# Altium PCB REB215_XPRO_A.PcbDoc (part 2 of 2)
Units mm, origin at the board's own origin, x right, y up, seen from the top; angles counter-clockwise.
Board outline 71.5 x 30 mm, 4 copper layers (Top Layer LF-signals, Mid-1, Mid-2, Bottom Layer LF-signals), stack 0.778 mm thick; 79 components, 55 nets, 329 pads, 316 vias.
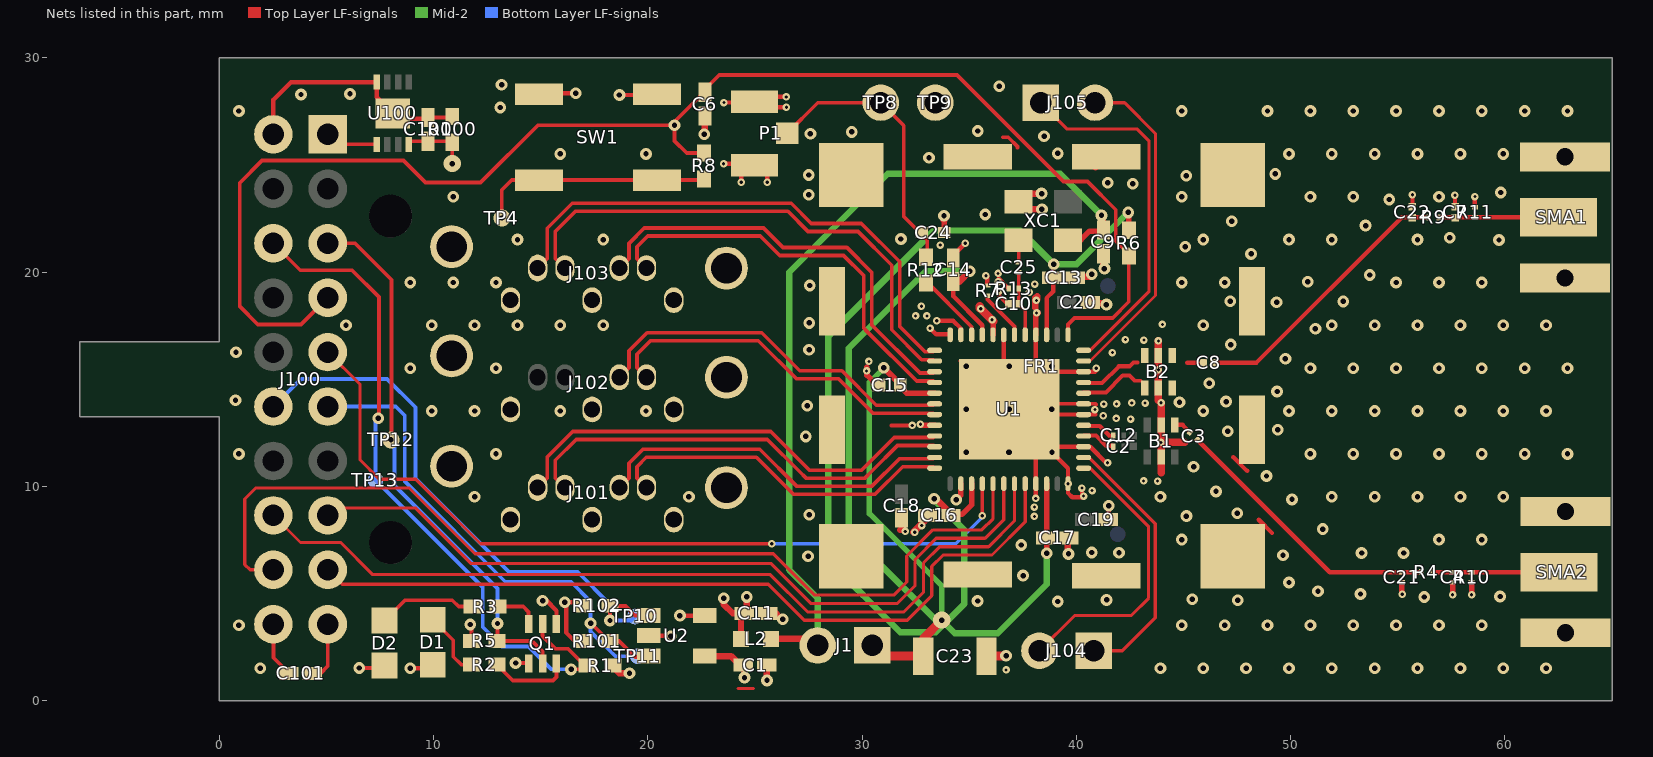
[diagram p4: the nets of this part, all layers, seen from the top]

## Via types
v1: diameter 0.55, hole 0.25, Top Layer LF-signals to Bottom Layer LF-signals, 165 vias
v2: diameter 0.35, hole 0.15, Top Layer LF-signals to Bottom Layer LF-signals, 66 vias
v3: diameter 0.55, hole 0.25, Top Layer LF-signals to Bottom Layer LF-signals, tented both sides, 59 vias
v4: diameter 0.55, hole 0.25, Top Layer LF-signals to Bottom Layer LF-signals, tented top, 19 vias
v5: diameter 0.55/0.55/0.55/0.8 (per signal layer), hole 0.25, Top Layer LF-signals to Bottom Layer LF-signals, tented top, 3 vias
v6: diameter 0.35/0.35/0.35/0.55 (per signal layer), hole 0.15, Top Layer LF-signals to Bottom Layer LF-signals, tented top, 2 vias
v7: diameter 0.8, hole 0.25, Top Layer LF-signals to Bottom Layer LF-signals, 1 vias
v8: diameter 0.55/0.55/0.55/0.55 (per signal layer), hole 0.15, Top Layer LF-signals to Bottom Layer LF-signals, tented top, 1 vias

## Nets (pads, with @x,y where several pads share a name; then routed paths per layer and width w, separated by ;. In a path a pad name is that pad's centre, name@x,y a point inside that pad or via, vN(x,y) a via of type N, cw(c..) or ccw(c..) an arc to the next point about the centre after c; other vN are vias at no path point) (continued)
GND: B1.2 B1.5 B2.2 B2.5 B2.6 C1.1 C4.2 C6.2 C7.2 C9.2 C10.2 C11.1 C13.2 C14.2 C15.2 C16.2 C17.2 C18.2 C19.2 C20.2 C21.2 C22.2 C23.2 C24.2 C100.2 C101.2 FR1.1 J100.2@2.53,26.43 J100.19@5.07,3.57 J101.1@21.213,8.45 J101.4@17.403,8.45 J101.7@13.593,8.45 J101.8@10.843,10.95 J101.9@23.673,9.95 J102.1@21.213,13.596 J102.4@17.403,13.596 J102.7@13.593,13.596 J102.8@10.843,16.096 J102.9@23.673,15.096 J103.1@21.213,18.692 J103.4@17.403,18.692 J103.7@13.593,18.692 J103.8@10.843,21.192 J103.9@23.673,20.192 P1.2 P1.3 Q1.1 Q1.4 R5.2 R7.2 R10.1 R11.1 R13.1 R100.1 SMA1.2 SMA1.2.1 SMA2.2 SMA2.2.1 SW1.1 SW1.2 TP9.1 U1.3 U1.6 U1.7 U1.10@40.337,15.355 U1.16@38.112,17.08 U1.19 U1.20 U1.23 U1.24 U1.32 U1.38 U1.45 U1.48 U1.49 U2.2 U2.5 U100.4 U100.9 XC1.2 | length 100.4
  Top Layer LF-signals w0.15: 24.219,0.579 24.918,0.579
  Top Layer LF-signals w0.175: C101.2@4.35,1.275 4.725,1.275 5.07,1.62 J100.19@5.07,3.57 ; 36.576,26.299 36.819,26.299 37.249,25.869 37.249,25.807 ; v4(36.862,13.605) 37.112,13.855 U1.7@40.337,13.855 40.891,13.855 40.919,13.827 ; U1.49@37.112,13.355 U1.6@40.234,13.355 ; U1.6@40.337,13.355 40.902,13.355
  Top Layer LF-signals w0.2: v2@35.463,18.362 v2(35.534,18.291) ; U1.20@36.099,17.067 U1.20@36.112,17.08 ; v1@41.263,20.211 v1(41.306,20.168)
  Top Layer LF-signals w0.203: J100.2@2.53,26.43 2.53,28.045 3.35,28.865 U100.4@7.35,28.865 7.35,28.165 U100.9@8.1,27.415 ; U100.9@8.35,27.165 9.75,27.165 9.8,27.215 R100.1@10.875,27.215 ; R5.2@11.772,2.793 v3@11.772,3.559 ; v3(13.833,1.763) Q1.4@14.413,1.763 ; SW1.1@14.925,28.297 14.975,28.347 v3(16.643,28.347) ; v3(15.094,4.663) 15.282,4.663 15.739,4.206 Q1.1@15.739,3.587 ; v3(18.676,28.268) 20.396,28.268 SW1.2@20.425,28.297 ; U2.2@20.049,3.035 21.05,3.035 v3(21.075,3.01) ; v3(21.5,3.975) 22.639,3.975 U2.5@22.649,3.985 ; v2(23.539,25.064) P1.2@24.907,25.064 ; v2(23.552,27.917) 24.942,27.917 P1.3@24.973,27.948 ; v2(24.361,24.201) P1.2@24.361,24.717 ; P1.2@24.642,24.998 P1.2@24.973,24.998 25.451,24.998 25.58,24.869 v2(25.58,24.192) ; v2(26.461,28.18) 25.205,28.18 P1.3@24.973,27.948 ; v2(26.469,27.697) 25.224,27.697 P1.3@24.973,27.948 ; 31.374,12.847 v2(32.337,12.847) ; v2(33.172,17.388) 33.456,17.104 34.103,17.104 34.112,17.095 U1.24@34.112,17.08 ; v2(33.482,17.73) 34.249,17.73 34.612,17.367 U1.23@34.612,17.08 ; C14.2@34.252,20.611 C14.2@34.336,20.611 ; C14.2@34.252,20.661 34.252,20.784 v2(34.819,21.351) ; U1.49@34.612,15.855 35.719,14.747 35.719,14.197 36.311,13.605 v4(36.862,13.605) ; U1.49@34.617,12.855 34.849,13.087 v4(34.849,13.604) ; v2@35.772,19.859 35.836,19.795 R7.2@35.836,19.41 ; v2@36.373,19.698 R13.1@36.839,19.232 ; v2@36.461,19.071 36.377,19.071 36.368,19.08 v2(36.368,19.118) 36.368,18.937 36.787,18.518 C10.2@36.787,18.48 ; U1.49@36.612,15.604 U1.19@36.612,17.08 ; v2(38.101,9.442) 38.112,9.453 38.112,11.332 38.382,11.602 v4(38.865,11.602) ; U1.16@38.112,17.053 38.112,15.85 38.356,15.606 v4(38.858,15.606) 39.109,15.355 U1.10@40.337,15.355 40.868,15.355 40.93,15.417 40.929,15.418 v2(40.929,15.519) ; v2(40.261,9.923) 40.261,9.499 39.805,9.499 39.612,9.692 v2(39.612,10.13) 39.612,10.855 v4(38.865,11.602) ; v1@40.592,19.78 v1(40.716,19.904) ; v1@41.339,18.546 41.401,18.608 v1(41.401,18.486) ; v2@41.422,11.076 40.643,11.855 U1.3@40.337,11.855 39.118,11.855 v4(38.865,11.602) ; C19.2@41.484,8.458 41.509,8.483 v1(41.509,9.102) ; 47.324,11.369 47.967,10.726 ; 48.508,8.446 49.125,7.829 ; v2@55.191,4.977 v2(55.202,4.966) ; v2(55.682,23.61) 55.687,23.605 C22.2@55.687,23.058 ; v2(57.555,4.949) v2@57.557,4.951 ; v2(57.667,23.594) 57.667,23.085 C7.2@57.694,23.058 ; R11.1@58.596,23.033 v2@58.596,23.518
  Top Layer LF-signals w0.254: C11.1@25.553,4.079 26.018,4.079 v3(26.294,3.803) ; v2(30.212,15.394) 30.212,15.547 30.22,15.555 30.22,15.197 C15.2@30.782,14.635 ; v2(32.725,12.899) 32.769,12.855 U1.32@33.387,12.855 ; v1@33.82,22.431 33.83,22.421 C24.2@33.83,21.764 ; v1(34.396,9.377) 34.612,9.593 U1.38@34.612,10.13 ; U1.20@36.112,17.08 v2@36.112,17.715 ; U1.16@38.112,17.08 v2@38.112,18.01 ; v2@55.191,4.977 C21.2@55.191,5.493 ; v2@57.557,4.951 C4.2@57.557,5.489 ; v2(58.441,4.944) R10.1@58.441,5.503
  Top Layer LF-signals w0.3: v3@22.667,26.431 C6.2@22.667,27.29 ; C1.1@25.558,1.664 25.558,0.959 v3(25.566,0.951) ; FR1.1@28.347,11.193 28.593,11.439 FR1.1@28.593,13.001 ; FR1.1@28.547,7.185 FR1.1@29.493,6.239 ; 31.815,7.969 31.784,7.969 31.846,8.031 C18.2@31.846,8.592 ; v2@32.396,7.872 33.101,8.577 C16.2@33.101,8.695 ; v1@33.82,22.431 33.872,22.483 33.823,22.532 v1(33.823,22.63) ; C23.2@35.785,2.107 C23.2@35.804,2.088 ; 38.084,18.333 v2@38.084,18.801 ; v2@38.122,18.069 38.172,18.119 38.172,18.07 v2@38.21,18.108 ; v2(38.134,18.68) 38.181,18.727 38.181,18.866 38.182,18.867 38.182,18.852 v2@38.166,18.836 ; v3(38.378,23.667) 37.68,23.667 XC1.2@37.307,23.294 37.66,22.941 v3(38.391,22.941) ; C17.2@39.607,7.598 39.607,6.877 v1(39.631,6.853) ; C13.2@39.983,19.854 40.056,19.78 v1@40.592,19.78 ; C20.2@40.653,18.716 40.822,18.546 v1@41.339,18.546 ; FR1.1@40.757,25.026 FR1.1@40.894,24.889 ; v1@41.263,20.211 C9.2@41.263,20.914
  Top Layer LF-signals w0.35: 43.832,14.032 v2(43.832,15.444) v2(43.832,16.794) ; 43.953,10.651 v2@43.953,13.892 ; v2@43.956,12.06 45.05,12.06
  Top Layer LF-signals w0.4: v2@35.5,18.419 35.5,18.327 v2@36.112,17.715 ; C23.2@35.804,2.088 36.71,2.088 v3(36.722,2.1)
  other v1: 43.92,1.52 45.92,1.52 47.92,1.52 49.92,1.52 51.92,1.52 53.92,1.52 55.92,1.52 57.92,1.52 59.92,1.52 61.92,1.52 44.92,3.52 46.92,3.52 48.92,3.52 50.92,3.52 52.92,3.52 54.92,3.52 56.92,3.52 58.92,3.52 39.135,4.631 35.392,4.655 47.534,4.687 41.41,4.706 45.405,4.741 56.228,4.841 59.773,4.867 53.26,4.984 51.277,5.108 49.92,5.52 37.516,5.84 27.481,6.749 49.64,6.794 41.991,6.907 53.31,6.893 55.269,6.893 40.713,6.916 37.429,7.272 44.92,7.52 56.92,7.52 58.92,7.52 51.5,8.009 45.134,8.617 27.535,8.677 47.508,8.753 50.062,9.398 43.92,9.52 51.92,9.52 53.92,9.52 55.92,9.52 57.92,9.52 59.92,9.52 46.516,9.77 48.871,10.489 45.469,10.924 50.92,11.52 52.92,11.52 54.92,11.52 56.92,11.52 58.92,11.52 60.92,11.52 62.92,11.52 27.375,12.336 47.061,12.572 49.392,12.646 45.92,13.52 49.92,13.52 51.92,13.52 53.92,13.52 55.92,13.52 57.92,13.52 59.92,13.52 61.92,13.52 27.444,13.762 44.81,13.929 46.987,13.96 49.367,14.432 46.203,14.816 50.92,15.52 52.92,15.52 54.92,15.52 56.92,15.52 58.92,15.52 60.92,15.52 62.92,15.52 49.752,15.958 27.527,16.384 47.207,16.621 51.154,17.36 45.92,17.52 51.92,17.52 53.92,17.52 55.92,17.52 57.92,17.52 59.92,17.52 61.92,17.52 27.533,17.634 49.343,18.597 52.451,18.637 47.185,18.647 27.558,19.379 44.92,19.52 46.92,19.52 54.92,19.52 56.92,19.52 58.92,19.52 50.798,19.557 53.686,19.871 48.152,20.854 45.085,21.19 59.722,21.504 45.92,21.52 49.92,21.52 51.92,21.52 55.92,21.52 31.812,21.545 57.427,21.606 53.498,22.173 47.255,22.377 35.746,22.693 54.599,23.389 44.92,23.52 50.92,23.52 52.92,23.52 56.92,23.52 27.508,23.615 59.804,23.717 42.632,24.127 41.464,24.168 45.127,24.504 27.508,24.537 49.284,24.587 33.123,25.337 49.92,25.52 51.92,25.52 53.92,25.52 55.92,25.52 57.92,25.52 59.92,25.52 39.128,25.541 38.493,26.341 27.59,26.464 29.517,26.546 35.398,26.587 44.92,27.52 48.92,27.52 50.92,27.52 52.92,27.52 54.92,27.52 56.92,27.52 58.92,27.52 60.92,27.52 62.92,27.52 36.402,28.677
  other v2: 36.722,1.437 32.462,7.859 32.013,7.902 32.782,8.174 38.041,8.601 38.041,9.042 40.336,9.553 40.735,9.812 43.133,10.262 43.787,10.255 41.459,11.112 43.947,12.055 42.528,13.144 41.864,13.173 41.253,13.302 40.868,13.586 41.275,13.848 41.875,13.851 43.207,13.889 42.581,13.897 43.951,13.902 30.32,15.838 41.68,16.248 43.15,16.832 42.289,16.858 44.014,17.559 36.068,17.777 33.025,17.956 32.499,17.961 38.14,18.099 32.767,18.413 37.808,19.052 38.055,19.442 36.357,19.56 35.782,19.83 36.347,19.944 33.649,21.263 58.596,23.527
  other v3: 1.92,1.52 0.92,3.52 11.718,3.559 11.92,9.52 21.92,9.52 0.92,11.52 12.92,11.52 9.92,13.52 11.92,13.52 15.92,13.52 19.92,13.52 0.764,14.028 8.92,15.52 12.92,15.52 0.784,16.263 5.92,17.52 9.92,17.52 11.92,17.52 13.92,17.52 15.92,17.52 17.92,17.52 8.92,19.52 10.92,19.52 12.92,19.52 13.92,21.52 17.92,21.52 10.92,23.52 15.92,25.52 19.92,25.52 22.639,26.431 0.92,27.52 13.116,27.687 3.818,28.294 6.103,28.318 13.181,28.743
  other v4: 34.86,11.606 34.862,11.605 36.845,11.602 36.862,11.605 38.862,11.605 34.862,13.605 36.862,13.605 38.859,13.611 38.862,13.605 34.862,15.605 34.869,15.605 36.861,15.604 36.862,15.605 38.862,15.605
ID_DATA: J100.1@5.07,26.43 U100.5 | length 1.8
  Top Layer LF-signals w0.152: J100.1@5.535,25.965 U100.5@7.35,25.965
ID_SCL: J100.12@2.53,13.73 R102.1 TP10.1 U2.1 | length 27.1
  Top Layer LF-signals w0.175: v3@18.238,3.926 18.238,4.42 18.958,4.42 19.393,3.985 U2.1@20.049,3.985 ; v3@18.329,3.835 v3@18.423,3.741
  Bottom Layer LF-signals w0.175: J100.12@2.53,13.73 3.816,15.016 7.836,15.016 9.156,13.696 9.156,10.383 13.53,6.009 16.728,6.009 18.238,4.499 18.238,3.926 v3@18.329,3.835 ; v3(18.238,3.744) 19.215,3.744 TP10.1@19.404,3.933
ID_SDA: J100.11@5.07,13.73 R101.1 TP11.1 U2.3 | length 25.1
  Top Layer LF-signals w0.175: v3(17.333,3.613) 17.357,3.613 R101.1@18.18,2.79 ; R101.1@18.389,2.847 18.389,2.793 18.661,2.793 19.414,2.04 U2.3@20.004,2.04
  Bottom Layer LF-signals w0.175: J100.11@5.07,13.73 8.237,13.73 8.665,13.302 8.665,10.236 13.346,5.555 16.413,5.555 17.333,4.635 v3(17.333,3.613) 17.333,3.236 18.495,2.074 TP11.1@19.534,2.074
NetB1_1: B1.1 C3.1 | length 0.8
  Top Layer LF-signals w0.21: B1.1@44.622,12.871 44.956,12.871 C3.1@45.282,12.545
NetB2_1: B2.1 C8.1 | length 0.8
  Top Layer LF-signals w0.2: 45.179,15.777 C8.1@45.93,15.777
NetC3_2: C3.2 C21.1 R4.1 | length 13
  Top Layer LF-signals w0.21: C3.2@45.661,12.164 51.824,6.001 R4.1@56.087,6.001
NetC4_1: C4.1 R4.2 R10.2 SMA2.1 | length 5.9
  Top Layer LF-signals w0.21: R4.2@56.647,6 SMA2.1@62.526,6
NetC6_1: C6.1 J100.7@5.07,18.81 R6.1 R8.2 U1.13@39.612,17.08 | length 67.9
  Top Layer LF-signals w0.175: J100.7@5.07,18.81 3.822,17.562 1.803,17.562 0.966,18.399 0.966,24.169 2.004,25.207 8.6,25.207 9.623,24.184 12.201,24.184 14.877,26.86 v3(21.249,26.86) ; C6.1@22.594,28.462 23.338,29.206 34.43,29.206 39.403,24.233 40.516,24.233 41.836,22.913 41.836,21.452 42.446,20.842 42.446,18.618 41.694,17.866 39.917,17.866 39.612,17.561 U1.13@39.612,17.08 ; R8.2@22.633,25.556 21.816,25.556 21.249,26.123 v3(21.249,26.86) ; C6.1@22.667,28.34 22.567,28.34 21.249,27.022 v3(21.249,26.86)
NetC7_1: C7.1 R9.2 R11.2 SMA1.1 | length 5.6
  Top Layer LF-signals w0.2: R9.2@56.906,22.558 SMA1.1@62.502,22.558
NetC8_2: C8.2 C22.1 R9.1 | length 12.8
  Top Layer LF-signals w0.2: C8.2@46.404,15.778 48.401,15.778 55.181,22.558 R9.1@56.432,22.558
NetC10_1: C10.1 C25.2 R13.2 U1.17@37.612,17.08 | length 3
  Top Layer LF-signals w0.175: C25.2@37.314,19.988 37.314,18.512 37.612,18.214 U1.17@37.612,17.08
NetC24_1: C24.1 P1.1 R12.1 TP8.1 | length 13.4
  Top Layer LF-signals w0.175: P1.1@26.498,26.473 27.935,27.91 TP8.1@30.873,27.91 31.946,26.838 31.946,22.599 33.047,21.497 33.047,20.777 R12.1@32.8,20.53
NetC25_1: C25.1 XC1.3 | length 1
  Top Layer LF-signals w0.175: C25.1@37.307,20.462 XC1.3@37.307,21.494
NetC100_1: C100.1 R100.2 U100.8 | length 2.9
  Top Layer LF-signals w0.175: U100.8@9,26.115 10.875,26.115 v5@10.875,25.115
  other v5: 10.875,25.065
NetD1_1: D1.1 R2.2 | length 3.1
  Top Layer LF-signals w0.175: D1.1@9.962,3.782 10.924,2.82 10.924,2.054 11.292,1.686 R2.2@11.767,1.686
NetD2_1: D2.1 R3.2 | length 4.6
  Top Layer LF-signals w0.175: D2.1@7.72,3.746 8.668,4.694 10.877,4.694 11.176,4.395 R3.2@11.81,4.395
NetJ100_5: J100.5@5.07,21.35 Q1.5 R5.1 TP12.1 | length 25.5
  Top Layer LF-signals w0.175: J100.5@5.07,21.35 6.343,21.35 8.043,19.65 v5@8.043,12.178 ; v3(12.99,3.606) 12.99,2.811 13.008,2.793 14.594,2.793 15.089,2.298 Q1.5@15.089,1.737
  Bottom Layer LF-signals w0.175: TP12.1@7.918,12.141 8.178,11.881 8.178,10.048 12.991,5.235 v3@12.991,3.593
  other v5: 8.021,12.172
NetJ100_6: J100.6@2.53,21.35 Q1.2 R1.1 TP13.1 | length 32.5
  Top Layer LF-signals w0.175: J100.6@2.53,21.35 3.787,20.093 6.198,20.093 7.453,18.838 7.453,13.244 v4@7.405,13.196 ; Q1.2@15.089,3.587 15.089,3.029 15.69,2.428 16.279,2.428 17.07,1.637 R1.1@17.173,1.637 17.002,1.466 v3(16.421,1.466)
  Bottom Layer LF-signals w0.175: v4@7.405,13.196 7.29,13.081 TP13.1@7.29,10.296 12.305,5.281 12.305,3.429 13.199,2.535 14.432,2.535 15.501,1.466 v3(16.421,1.466)
  other v4: 7.427,13.18
NetJ100_9: J100.9@5.07,16.27 U1.40 | length 38.4
  Top Layer LF-signals w0.15: J100.9@5.07,16.27 6.572,14.768 6.572,11.24 7.47,10.342 9.177,10.342 12.195,7.324 v2(25.785,7.324) ; v2@35.612,8.574 U1.40@35.612,10.13
  Bottom Layer LF-signals w0.15: v2(25.785,7.324) 34.377,7.324 v2@35.612,8.559
  other v2: 35.612,8.637
NetJ100_15: J100.15@5.07,8.65 U1.42 | length 37.5
  Top Layer LF-signals w0.15: J100.15@5.07,8.65 5.422,9.002 9.158,9.002 11.759,6.401 25.762,6.401 27.629,4.534 31.63,4.534 32.476,5.38 32.476,6.593 33.465,7.582 35.742,7.582 36.612,8.452 U1.42@36.612,10.13
NetJ100_16: J100.16@2.53,8.65 U1.43 | length 40.7
  Top Layer LF-signals w0.15: J100.16@2.53,8.65 3.796,7.384 5.673,7.384 7.168,5.889 25.723,5.889 27.468,4.144 31.942,4.144 32.866,5.068 32.866,6.432 33.626,7.192 35.903,7.192 37.112,8.401 U1.43@37.112,10.13
NetJ100_17: J100.17@5.07,6.11 U1.44 | length 38
  Top Layer LF-signals w0.15: J100.17@5.07,6.11 5.741,5.439 25.621,5.439 27.306,3.754 32.104,3.754 33.256,4.906 33.256,6.27 33.788,6.802 36.065,6.802 37.612,8.349 U1.44@37.612,10.13
NetJ100_18: J100.18@2.53,6.11 U1.41 | length 45.5
  Top Layer LF-signals w0.15: J100.18@2.53,6.11 1.441,6.11 1.196,6.355 1.196,9.415 1.709,9.928 8.868,9.928 11.939,6.857 25.858,6.857 27.783,4.932 31.476,4.932 32.086,5.542 32.086,6.755 33.303,7.972 35.58,7.972 36.112,8.504 U1.41@36.112,10.13
NetJ104_1: J104.1@40.812,2.335 U1.2 | length 12.5
  Top Layer LF-signals w0.15: U1.2@40.337,11.355 40.586,11.355 43.684,8.257 43.684,3.877 42.142,2.335 J104.1@40.812,2.335
NetJ104_2: J104.2@38.272,2.335 U1.1 | length 13.6
  Top Layer LF-signals w0.15: J104.2@38.272,2.335 39.916,3.979 42.559,3.979 43.372,4.792 43.372,8.121 40.638,10.855 U1.1@40.337,10.855
NetJ105_1: J105.1@38.329,27.91 U1.12@40.337,16.355 | length 17
  Top Layer LF-signals w0.15: J105.1@38.329,27.91 39.554,26.685 42.82,26.685 43.394,26.111 43.394,19.108 40.641,16.355 U1.12@40.337,16.355
NetJ105_2: J105.2@40.869,27.91 U1.11@40.337,15.855 | length 15.6
  Top Layer LF-signals w0.15: U1.11@40.337,15.855 40.637,15.855 43.694,18.912 43.694,26.465 42.249,27.91 J105.2@40.869,27.91
NetQ1_3: Q1.3 R3.1 | length 2.1
  Top Layer LF-signals w0.175: R3.1@13.01,4.395 14.189,4.395 14.439,4.145 Q1.3@14.439,3.587
NetQ1_6: Q1.6 R2.1 | length 3.8
  Top Layer LF-signals w0.175: R2.1@12.967,1.686 13.703,0.95 15.58,0.95 15.739,1.109 Q1.6@15.739,1.737
NetR7_1: R7.1 U1.18 | length 2.3
  Top Layer LF-signals w0.175: R7.1@35.854,18.902 35.854,18.727 37.112,17.469 U1.18@37.112,17.08
NetR8_1: R8.1 SW1.3 SW1.4 TP4.1 | length 11
  Top Layer LF-signals w0.175: v5(13.19,22.526) 13.19,23.836 13.651,24.297 SW1.3@14.925,24.297 SW1.4@20.425,24.297 22.574,24.297 R8.1@22.633,24.356
NetR12_2: R12.2 U1.22 | length 3.5
  Top Layer LF-signals w0.175: R12.2@32.837,19.587 32.981,19.587 35.112,17.456 U1.22@35.112,17.08
RF09_N: B2.3 U1.9 | length 2.9
  Top Layer LF-signals w0.19: U1.9@40.377,14.825 41.195,14.825 41.979,15.609 42.474,15.609 42.656,15.791 42.854,15.791
RF09_P: B2.4 U1.8 | length 3.1
  Top Layer LF-signals w0.17: 42.706,14.935 43.003,14.935
  Top Layer LF-signals w0.19: U1.8@40.337,14.385 41.379,14.385 ; 41.379,14.385 42.163,15.169 42.472,15.169 42.706,14.935
RF24_N: C12.1 U1.5 | length 1.4
  Top Layer LF-signals w0.17: U1.5@40.337,12.855 U1.5@40.359,12.832
  Top Layer LF-signals w0.195: U1.5@40.533,12.828 41.093,12.828 ; 41.093,12.829 41.578,12.344 41.686,12.344 C12.1@41.73,12.388
RF24_P: C2.1 U1.4 | length 1.6
  Top Layer LF-signals w0.17: U1.4@40.337,12.355 U1.4@40.363,12.381
  Top Layer LF-signals w0.195: U1.4@40.363,12.382 40.909,12.382 ; 40.909,12.381 41.392,11.898 C2.1@41.701,11.898
RXCLK_N: J101.6@14.863,9.95 U1.33 | length 21.6
  Top Layer LF-signals w0.17: J101.6@14.863,9.95 15.312,10.399 15.312,11.375 16.505,12.568 25.733,12.568 27.537,10.764 29.982,10.764 31.501,12.283 32.88,12.283 33.315,12.283 U1.33@33.387,12.355
RXCLK_P: J101.5@16.133,9.95 U1.34 | length 21
  Top Layer LF-signals w0.17: J101.5@16.133,9.95 15.684,10.399 15.684,11.22 16.659,12.195 25.578,12.195 27.063,10.71 27.382,10.391 30.137,10.391 30.456,10.71 31.656,11.91 33.331,11.91 U1.34@33.387,11.855
RXD09_N: J102.3@18.673,15.096 U1.30 | length 17.5
  Top Layer LF-signals w0.17: J102.3@18.673,15.096 19.122,15.545 19.122,16.328 19.969,17.175 25.314,17.175 27.093,15.396 29.059,15.396 30.663,13.791 32.888,13.791 33.323,13.791 U1.30@33.387,13.855
RXD09_P: J102.2@19.943,15.096 U1.31 | length 16.8
  Top Layer LF-signals w0.17: J102.2@19.943,15.096 19.494,15.545 19.494,16.173 20.124,16.802 25.159,16.802 26.939,15.023 28.904,15.023 30.509,13.418 32.734,13.418 ; 32.734,13.418 33.323,13.418 U1.31@33.387,13.355
RXD24_N: J101.3@18.673,9.95 U1.35 | length 17.1
  Top Layer LF-signals w0.17: J101.3@18.673,9.95 19.122,10.399 19.122,11.078 19.78,11.736 25.224,11.736 26.943,10.017 30.466,10.017 31.743,11.294 33.326,11.294 U1.35@33.387,11.355
RXD24_P: J101.2@19.943,9.95 U1.36 | length 16.5
  Top Layer LF-signals w0.17: J101.2@19.943,9.95 19.494,10.399 19.494,10.923 19.934,11.363 25.069,11.363 26.788,9.644 30.621,9.644 31.898,10.921 33.32,10.921 U1.36@33.387,10.855
TXCLK_N: J103.6@14.863,20.192 U1.25 | length 25.3
  Top Layer LF-signals w0.17: J103.6@14.863,20.192 15.312,20.64 15.312,22.052 16.472,23.212 26.695,23.212 27.635,22.272 29.968,22.272 31.758,20.482 31.758,17.464 32.933,16.289 33.321,16.289 U1.25@33.387,16.355
TXCLK_P: J103.5@16.133,20.192 U1.26 | length 24.6
  Top Layer LF-signals w0.17: J103.5@16.133,20.192 15.684,20.64 15.684,21.897 16.626,22.839 26.54,22.839 27.48,21.899 29.813,21.899 31.385,20.327 31.385,17.309 32.778,15.916 33.325,15.916 U1.26@33.387,15.855
TXD_N: J103.3@18.673,20.192 U1.27 | length 20.2
  Top Layer LF-signals w0.17: J103.3@18.673,20.192 19.122,20.64 19.122,21.341 19.841,22.061 25.4,22.061 26.309,21.152 29.292,21.152 30.445,19.999 30.445,17.549 32.702,15.292 33.324,15.292 U1.27@33.387,15.355
TXD_P: J103.2@19.943,20.192 U1.28 | length 19.5
  Top Layer LF-signals w0.17: J103.2@19.943,20.192 19.494,20.64 19.494,21.187 19.996,21.688 25.246,21.688 26.155,20.779 29.138,20.779 30.072,19.844 30.072,17.394 30.231,17.235 32.547,14.919 33.322,14.919 U1.28@33.387,14.855
VCC_3V3: C13.1 C14.1 C15.1 C16.1 C17.1 C23.1 J1.1@30.471,2.582 R6.2 U1.15 U1.21 U1.29 U1.39 U1.46 | length 107.4
  Top Layer LF-signals w0.203: C14.1@34.252,19.561 34.252,18.883 35.612,17.523 U1.21@35.612,17.08 ; U1.15@38.612,17.08 38.612,18.79 38.919,19.097 38.919,20.46 v1@38.946,20.487
  Top Layer LF-signals w0.254: C15.1@31.782,14.655 32.082,14.355 U1.29@33.387,14.355 ; C16.1@34.357,8.695 34.662,8.695 35.112,9.145 U1.39@35.112,10.13 ; U1.46@38.612,10.13 38.612,7.603 38.607,7.598 38.615,7.59 v1(38.615,6.883) ; v1(42.425,22.79) 42.446,22.769 R6.2@42.446,21.903
  Top Layer LF-signals w0.3: v1(31.016,15.538) 31.782,14.772 C15.1@31.782,14.735 C15.1@31.782,14.655 ; v1@33.448,9.429 34.154,8.723 C16.1@34.154,8.649 ; C14.1@34.545,19.561 v3(35.025,20.041)
  Top Layer LF-signals w0.4: J1.1@30.471,2.582 30.965,2.088 C23.1@32.854,2.088 32.854,2.898 v7(33.719,3.763)
  Mid-2 w0.254: J1.1@30.471,2.582 J1.1@30.831,2.942 ; v1(31.016,15.538) 30.338,14.86 30.338,8.731 33.719,5.35 v7(33.719,3.763)
  Mid-2 w0.3: v1(33.361,9.429) 33.361,9.367 34.777,7.951 34.777,4.534 34.006,3.763 v7(33.719,3.763) ; v3(35.025,20.041) 32.968,20.041 29.379,16.452 29.379,7.83 33.446,3.763 v7(33.719,3.763) ; v1(38.615,6.883) 38.615,5.444 36.329,3.158 34.324,3.158 v7(33.719,3.763) ; v1@38.879,20.42 v1@38.889,20.431 ; v1@38.946,20.487 v1@38.889,20.431 ; v1(42.425,22.79) 40.009,20.374 v1(38.946,20.374) v1@38.889,20.431 ; v7(33.719,3.763) 33.719,3.48 33.439,3.2 31.787,3.2 28.414,6.573 28.414,17 33.359,21.945 37.375,21.945 v1@38.889,20.431
VCC_B_3.3V: C9.1 J1.2@27.931,2.582 L2.1 XC1.4 | length 40.1
  Top Layer LF-signals w0.254: XC1.4@39.607,21.494 40.196,21.494 40.616,21.914 41.263,21.914 41.263,22.561 v1(41.174,22.65)
  Top Layer LF-signals w0.3: L2.1@25.749,2.885 27.628,2.885 J1.2@27.931,2.582
  Mid-2 w0.3: J1.2@27.931,2.582 27.931,4.784 26.609,6.106 26.609,19.993 31.202,24.586 39.238,24.586 v1(41.174,22.65)
VCC_TARGET: C1.2 C11.2 C101.1 D1.2 D2.2 J100.20@2.53,3.57 L2.2 R1.2 R101.2 R102.2 U2.4 | length 15.6
  Top Layer LF-signals w0.175: J100.20@2.53,3.57 2.53,2.011 3.25,1.291 C101.1@3.25,1.275
  Top Layer LF-signals w0.203: v3(6.536,1.53) D2.2@7.604,1.53 ; v3(8.918,1.52) 9.8,1.52 D1.2@9.962,1.682 ; R101.2@17.189,2.793 16.58,2.793 16.191,3.182 16.191,4.534 v3(16.127,4.598) 17.045,4.598 R102.2@17.206,4.437
  Top Layer LF-signals w0.3: R1.2@18.323,1.637 18.675,1.285 v3(19.149,1.285) ; U2.4@22.649,2.085 23.885,2.085 24.306,1.664 C1.2@24.458,1.664 24.514,1.608 v3@24.514,1.088 ; v3(23.549,4.785) 23.549,4.491 23.961,4.079 C11.2@24.503,4.079 ; L2.2@24.352,2.885 24.352,3.827 24.623,4.098 v3(24.623,4.848)
  other v3: 24.511,1.081
pads on no net: B1.6 J1.1@30.471,2.582 J1.2@27.931,2.582 J100.1@5.07,26.43 J100.2@2.53,26.43 J100.3 J100.4 J100.5@5.07,21.35 J100.6@2.53,21.35 J100.7@5.07,18.81 J100.8 J100.9@5.07,16.27 J100.10 J100.11@5.07,13.73 J100.12@2.53,13.73 J100.13 J100.14 J100.15@5.07,8.65 J100.16@2.53,8.65 J100.17@5.07,6.11 J100.18@2.53,6.11 J100.19@5.07,3.57 J100.20@2.53,3.57 J101.1@21.213,8.45 J101.2@19.943,9.95 J101.3@18.673,9.95 J101.4@17.403,8.45 J101.5@16.133,9.95 J101.6@14.863,9.95 J101.7@13.593,8.45 J101.8@23.673,9.95 J101.9@10.843,10.95 J102.1@21.213,13.596 J102.2@19.943,15.096 J102.3@18.673,15.096 J102.4@17.403,13.596 J102.5 J102.6 J102.7@13.593,13.596 J102.8@23.673,15.096 J102.9@10.843,16.096 J103.1@21.213,18.692 J103.2@19.943,20.192 J103.3@18.673,20.192 J103.4@17.403,18.692 J103.5@16.133,20.192 J103.6@14.863,20.192 J103.7@13.593,18.692 J103.8@23.673,20.192 J103.9@10.843,21.192 J104.1@40.812,2.335 J104.2@38.272,2.335 J105.1@38.329,27.91 J105.2@40.869,27.91 TP8.3 TP9.3 U1.4.8 U1.10@37.862,12.605 U1.11@37.862,14.605 U1.12@35.837,14.58 U1.13@35.862,12.605 U1.14@36.862,12.605 U1.16@37.862,13.605 U1.17@35.862,13.605 U100.1 U100.2 U100.3 U100.6 U100.7 XC1.1

## Polygon pours and split planes (outlines as drawn)
GND on Bottom Layer LF-signals "BOTTOM" (solid, remove dead copper, pour order 5): 0,30 0,16.75 -6.5,16.75 -6.5,13.25 0,13.25 0,0 65,0 65,30 0,30
GND on Top Layer LF-signals "TOP" (solid, remove dead copper, pour order 3): -0.25,29.75 -0.25,16.5 -6.75,16.5 -6.75,13 -0.25,13 -0.25,-0.25 64.558,-0.25 64.632,-0.324 64.706,-0.25 64.75,-0.25 64.75,29.75
GND on Mid-1 "GND" (solid, remove dead copper, pour order 4): 0.25,29.7 0.25,16.475 -6.225,16.475 -6.225,13.525 0.25,13.525 0.252,13.523 0.252,0.3 64.7,0.3 64.7,29.7
VCC_TARGET on Mid-2 "VCC_TARGET" (solid, remove dead copper, pour order 6): 0.227,5.258 0.227,0.325 0.252,0.3 26.016,0.3 26.033,0.317 26.033,4.502 25.252,5.283

## Keep-outs
Top Layer LF-signals:
  circle w0.254: c8,22.62 r1.116
  circle w0.254: c8,7.38 r1.116
  circle w0.254: c46.887,27.761 r1.238
Keep-Out Layer:
  lines w0.1: 0.25,16.475 0.25,29.7 64.7,29.7 64.7,25.05 64.7,4.95 64.7,0.3 0.252,0.3 0.252,13.523 0.25,13.525 -6.225,13.525 -6.225,16.475 0.25,16.475 ; 0.25,16.475 0.25,16.475

## Other copper
Top Layer LF-signals:
  rectangle net GND: 43.66,13.937 45.207,15.177
  rectangle net RF09_N: 42.437,15.578 43.357,15.978
  rectangle net RF09_P: 42.437,14.778 43.357,15.178
  rectangle net NetB2_1: 44.307,15.578 45.207,15.978
  rectangle net NetC7_1: 60.703,22.46 60.705,22.655
  rectangle net NetC7_1: 60.57,22.46 60.57,22.655
  rectangle net GND: 37.869,17.933 38.355,19.102
  rectangle net GND: 35.556,19.579 36.285,20.123
  rectangle net GND: 36.169,18.928 36.597,20.123
  rectangle net GND: 37.695,18.546 38.338,19.261
  region net NetC4_1: 60.727,5.76 60.59,5.897 60.727,5.897
  region net NetC4_1: 60.592,6.104 60.725,6.237 60.727,6.237 60.727,6.104
  region net NetC7_1: 60.703,22.325 60.57,22.458 60.57,22.46 60.703,22.46
  region net NetC7_1: 60.57,22.655 60.703,22.788 60.705,22.788 60.705,22.655
  pour cut-out: 35.328,2.962 35.334,2.956 35.334,1.215 33.32,1.215 33.32,2.956 33.326,2.962 33.384,3.04 35.183,3.04
  pour cut-out: 26.306,3.654 26.306,2.089 25.061,2.089 25.061,3.609 25.106,3.654
  pour cut-out: 6.945,4.521 6.945,2.037 6.917,2.009 7.288,1.639 7.282,1.655 7.267,4.519
  pour cut-out: 34.001,16.799 40.075,16.799 40.102,16.826 40.102,10.522 33.633,10.522 33.522,10.633 33.522,16.753 33.577,16.808
  region net GND: 31.736,13.095 32.82,13.095 32.996,12.919 32.996,12.755 32.876,12.635 31.736,12.635
  region net GND: 29.468,15.702 30.217,14.953 30.439,15.175 30.439,15.596 29.924,16.111 29.881,16.111
  region net GND: 31.296,8.076 31.296,7.639 31.291,7.634 32.5,7.634 33.05,8.184 32.783,8.451 32.771,8.451 32.396,8.076 32.346,8.126 31.346,8.126
  region net GND: 40.074,9.985 40.425,10.336 41.834,8.932 41.834,8.491 41.596,8.253 41.084,8.253 41.055,8.282 41.055,8.971 40.764,9.262 40.358,9.262 40.074,9.546
  region net GND: 38.272,9.566 38.272,8.389 37.871,8.389 37.872,9.544 38.025,9.697
  region net GND: 33.212,17.082 32.962,17.082 32.281,17.763 32.283,18.247 32.718,18.653 32.9,18.654 33.674,17.88 33.674,17.544
  region net GND: 41.628,13.892 41.628,13.302 40.878,13.302 40.674,13.506 40.674,13.744 40.822,13.892
  region net GND: 41.885,16.328 40.941,15.31 40.826,15.31 40.726,15.412 40.726,15.571 41.753,16.598
  pour cut-out: 36.384,24.147 36.384,20.903 36.549,20.738 40.532,20.738 40.557,20.713 40.557,23.881 40.29,24.148
  pour cut-out: 32.704,22.219 33.325,22.219 33.405,22.139 33.405,21.389 33.255,21.389 33.255,21.072 32.305,21.072 32.305,21.86
  region net GND: 40.055,9.966 40.406,10.317 41.815,8.913 41.815,8.472 41.577,8.234 41.065,8.234 41.036,8.263 41.036,8.952 40.745,9.243 40.339,9.243 40.055,9.527
  region net GND: 31.736,13.095 32.82,13.095 32.996,12.919 32.996,12.755 32.876,12.635 31.736,12.635
  pour cut-out: 42.163,14.093 42.163,16.613 45.828,16.613 45.828,14.093
  pour cut-out: 42.953,10.846 44.953,10.846 44.953,13.396 42.953,13.396

## Silkscreen, mask and mechanical layers (free items; w line width, h text height)
Top Overlay:
  lines w0.1: 0.3,2.046 6.34,2.046 6.34,27.364 5.75,27.954 0.3,27.954 ; 32.112,0.468 32.677,0.468 ; 32.377,0.272 32.377,0.716 ; 1.006,27.954 1.006,27.954
  text "Sub GHz Antenna" at 52.589,28.34 h1.54
  text "2" at 2.1,28.2 h1.54
  text "1" at 4.6,28.2 h1.54
  text "1" at 36.267,27.804 h1.54
  text "B" at 51.456,13.158 h7
  text "J100" at 7.553,12.711 h1.52 r90
  text "1" at 31.45,4.176 h1.54
  text "1" at 42.638,2.903 h1.54
  text "2.4GHz Antenna" at 52.589,0.732 h1.54
Bottom Overlay:
  pour cut-out: 42.93,16.617 44.93,16.617 44.93,14.067 42.93,14.067
  lines w0.1: 1.25,2.046 6.34,2.046 6.34,27.364 5.75,27.954 1.25,27.954 1.25,2.046
  text "WIRELESS" at 41.484,24.164 h2
  text "PRO" at 18.439,24.153 h1
  text "PLAINED" at 27.505,24.141 h2
  text "X" at 30.936,24.142 h4
  text "REB215-XPRO-A" at 35.487,21.923 h2
  text "Atmel Corp © 2015" at 54.121,7.187 h2 r270
  text "A08-2463 Rev 1" at 40.25,6.396 h2
  text "VCC_MCU" at 36.388,3.858 h1.54
  text "VCC_3V3" at 27.779,3.788 h1.54
  text "t" at 10.77,1.822 h7
  text "c" at 18.425,0.684 h7
  text "p" at 58.753,0.553 h7
Top Paste:
  region: 64.652,24.808 64.652,25.958 60.802,25.958 60.802,24.808
  region: 64.652,19.158 64.652,20.308 60.802,20.308 60.802,19.158
  region: 64.676,8.25 64.676,9.4 60.826,9.4 60.826,8.25
  region: 64.676,2.6 64.676,3.75 60.826,3.75 60.826,2.6
  rectangle: 60.726,5.1 64.325,6.906
  rectangle: 60.7,21.658 64.303,23.46
Bottom Paste:
  region: 64.652,24.808 64.652,25.958 60.802,25.958 60.802,24.808
  region: 64.652,19.158 64.652,20.308 60.802,20.308 60.802,19.158
  region: 64.676,8.25 64.676,9.4 60.826,9.4 60.826,8.25
  region: 64.676,2.6 64.676,3.75 60.826,3.75 60.826,2.6
Top Solder:
  lines w0.21: 45.96,11.865 51.824,6.001 54.657,6.001 ; 46.855,15.735 48.358,15.735 55.181,22.558 ; 58.973,5.999 62.526,6 ; 59.181,22.558 62.502,22.558
Mechanical 1:
  the board outline again, w0.1
Mechanical 4:
  drawing of 189 lines, arcs and shapes, not listed
  text "Layer stackup" at -135.888,98.296 h5
  text "SOLDER LEVEL" at -101.846,80.482 h1.78
  text "( SEE NOTE 2A )" at -78.859,80.482 h1.78
  text "COPPER PLATE" at -101.846,77.942 h1.78
  text "35 um" at -76.573,76.672 h1.78
  text "LAYER 1" at -135.12,75.402 h1.78
  text "COPPER FOIL" at -101.846,75.402 h1.78
  text "}" at -80.129,75.275 h4.44
  text "Prepregs" at -101.732,72.371 h1.78
  text "( SEE NOTE 1A )" at -57.917,72.371 h1.78
  text "118 um" at -87.258,72.06 h1.78
  text "LAYER 2" at -135.12,67.864 h1.78
  text "COPPER FOIL" at -101.857,67.869 h1.78
  text "35 um" at -80.561,67.839 h1.78
  text "Note 3" at -149.862,61.315 h1.52
  text "(SEE NOTE 1B)" at -57.503,55.699 h1.52
  text "CORE" at -101.146,54.971 h1.78
  text "1200 um" at -86.795,54.971 h1.78
  text "LAYER 3" at -135.02,41.594 h1.78
  text "COPPER FOIL" at -101.732,41.548 h1.78
  text "35 um" at -80.461,41.365 h1.78
  text "Prepregs" at -101.632,37.628 h1.78
  text "118 um" at -87.281,37.628 h1.78
  text "Component Placement" at 2.784,35.493 h5
  text "LAYER 4" at -135.12,33.492 h1.78
  text "COPPER FOIL" at -101.846,33.492 h1.78
  text "35 um" at -76.573,32.222 h1.78
  text "COPPER PLATE" at -101.846,30.952 h1.78
  text "}" at -80.129,30.825 h4.44
  text "SOLDER LEVEL" at -101.846,28.412 h1.78
  text "( SEE NOTE 2A )" at -78.859,28.412 h1.78
  text "NOTE  1A:  DIELECTRIC S1000B" at -128.848,20.871 h1.78
  text "1B:  DIELECTRIC S1000" at -120.024,18.477 h1.52
  text "2A:  SURFACE PROTECTION: Chemical Gold" at -120.315,15.569 h1.78
  text "Extension Connector" at 6.3,14.7 h1
  text "3:  PCB Thickness to be calculated based on Stack up" at -118.861,12.515 h1.52
  text "THE BOARD MUST BE RoHS COMPLIANT" at -120.46,9.607 h1.78
  text "DETAIL A ( CROSS-SECTION )" at -128.721,4.361 h3.05
  text "SCALE = NONE" at -109.544,-0.211 h1.78
Mechanical 6:
  circle w0.254: c62.65,27.65 r1.35
  circle w0.254: c62.65,2.35 r1.35
  circle w0.254: c8,22.62 r1
  circle w0.254: c8,7.38 r1
  text "Mechanical Dimensions" at 2.1,31.375 h5
Mechanical 16:
  lines w0.127: -159,-66.915 -153.92,-66.915 ; -159,3.745 -153.92,3.745 ; -159,74.23 -153.92,74.23 ; -109.724,-137.4 -109.724,-132.32 ; -109.724,139.46 -109.724,144.54 ; -65.7,139.46 -65.7,144.54 ; -60.575,-137.4 -60.575,-132.32 ; -16.525,139.46 -16.525,144.54 ; -11.426,-137.4 -11.426,-132.32 ; 37.85,-137.4 37.85,-132.32 ; 37.85,139.46 37.85,144.54 ; 86.999,-137.4 86.999,-132.32 ; 86.999,139.46 86.999,144.54 ; 115.32,-124.7 229.62,-124.7 ; 115.32,-117.08 229.62,-117.08 ; 115.32,-109.46 153.42,-109.46 ; 136.148,-137.4 136.148,-132.32 ; 136.148,139.46 136.148,144.54 ; 153.42,-132.32 153.42,-117.08 153.42,-101.84 ; 185.424,-137.4 185.424,-132.32 ; 185.424,139.46 185.424,144.54 ; 206.76,-132.32 206.76,-117.08 ; 229.62,-66.915 234.7,-66.915 ; 229.62,3.7 234.7,3.7 ; 229.62,74.185 234.7,74.185 ; 115.32,-132.32 115.32,-101.84 ; 115.32,-132.32 229.62,-132.32 ; 115.32,-132.32 79.76,-132.32 79.76,-101.84 115.32,-101.84 ; 115.32,-101.84 153.42,-101.84 ; 153.42,-101.84 229.62,-101.84 229.62,-132.32 ; 229.62,-132.32 229.62,139.46 -153.92,139.46 -153.92,-132.32 229.62,-132.32 ; -159,-137.4 234.7,-137.4 234.7,144.54 -159,144.54 -159,-137.4
  text "1" at -134.963,141.111 h0.67
  text "4" at 12.628,141.111 h0.67
  text "5" at 61.904,141.111 h0.67
  text "6" at 110.926,141.111 h0.67
  text "7" at 160.456,141.111 h0.67
  text "8" at 209.478,141.111 h0.67
  text "2" at -88.474,140.975 h0.67
  text "3" at -41.924,140.825 h0.67
  text "A" at -157.095,107.301 h0.67
  text "A" at 231.525,107.256 h0.67
  text "B" at 231.605,39.201 h0.67
  text "B" at -157.095,36.689 h0.67
  text "C" at -157.188,-31.488 h0.67
  text "C" at 231.975,-37.1 h0.67
  text "D" at -157.095,-104.202 h0.67
  text "D" at 231.525,-104.202 h0.67
  text "ENGINEER:" at 116.59,-104.38 h0.67
  text "TITLE:" at 154.69,-104.38 h0.67
  text "PCB DESIGNER:" at 116.59,-111.873 h0.67
  text "B" at 80.75,-117 h22
  text "DATE:" at 116.59,-119.62 h0.67
  text "PART NO.:" at 154.69,-119.62 h0.67
  text "REV:" at 208.03,-119.62 h0.67
  text ".PRINT_DATE" at 116.7,-123.5 h0.67
  text "ATMEL NORWAY" at 84,-124.4 h0.67
  text "Vestre Rosten 79" at 83.97,-126.478 h0.67
  text "FILE NAME:" at 116.59,-127.24 h0.67
  text "DWG NO:" at 154.69,-127.24 h0.67
  text "SCALE:" at 208.03,-127.24 h0.67
  text "N-7075 Tiller" at 83.97,-129.78 h0.67
  text ".PCB_FILE_NAME_NO_PATH" at 117.86,-130.288 h0.67
  text "2" at -85.34,-135.688 h0.67
  text "3" at -35.81,-135.688 h0.67
  text "4" at 13.212,-135.688 h0.67
  text "5" at 61.904,-135.688 h0.67
  text "6" at 110.926,-135.688 h0.67
  text "7" at 160.456,-135.688 h0.67
  text "8" at 209.478,-135.688 h0.67
Drill Drawing:
  text ".legend" at 1.869,-28.566 h1

## Dimensions
65,0 to 46.9,3.9 on Mechanical 4
47.4,4.4 to 65,0 on Mechanical 4
0,0 to -6.5,13.25 on Mechanical 6
65,30 to 65,0 on Mechanical 6
0,0 to 65,0 on Mechanical 6
3.292,15 to 0,0 on Mechanical 4
0,0 to 3.8,14.5 on Mechanical 4
62.65,27.65 to 67.087,32.087 on Mechanical 6
64,2.35 to 65,0 on Mechanical 6
62.65,1 to 65,0 on Mechanical 6
8,22.62 to 0,0 on Mechanical 6
8,7.38 to 0,0 on Mechanical 6
8,7.38 to 0,0 on Mechanical 6
-6.5,13.25 to 0,13.25 on Mechanical 6
-6.5,16.75 to -6.5,13.25 on Mechanical 6
8,22.62 to -1.155,31.775 on Mechanical 6

## Text inside footprints (layer, text, board x,y; h text height)
LABEL1: Bottom Overlay "PCBA LABEL" at 37.594,8.223 h1.52